# Altium PCB PCB1.2.PcbDoc (part 2 of 2)
Units mm, origin at the board's own origin, x right, y up, seen from the top; angles counter-clockwise.
Board outline 43 x 43 mm, 4 copper layers (Top Layer, Mid-Layer 1, Mid-Layer 2, Bottom Layer); 150 components, 103 nets, 523 pads, 244 vias.
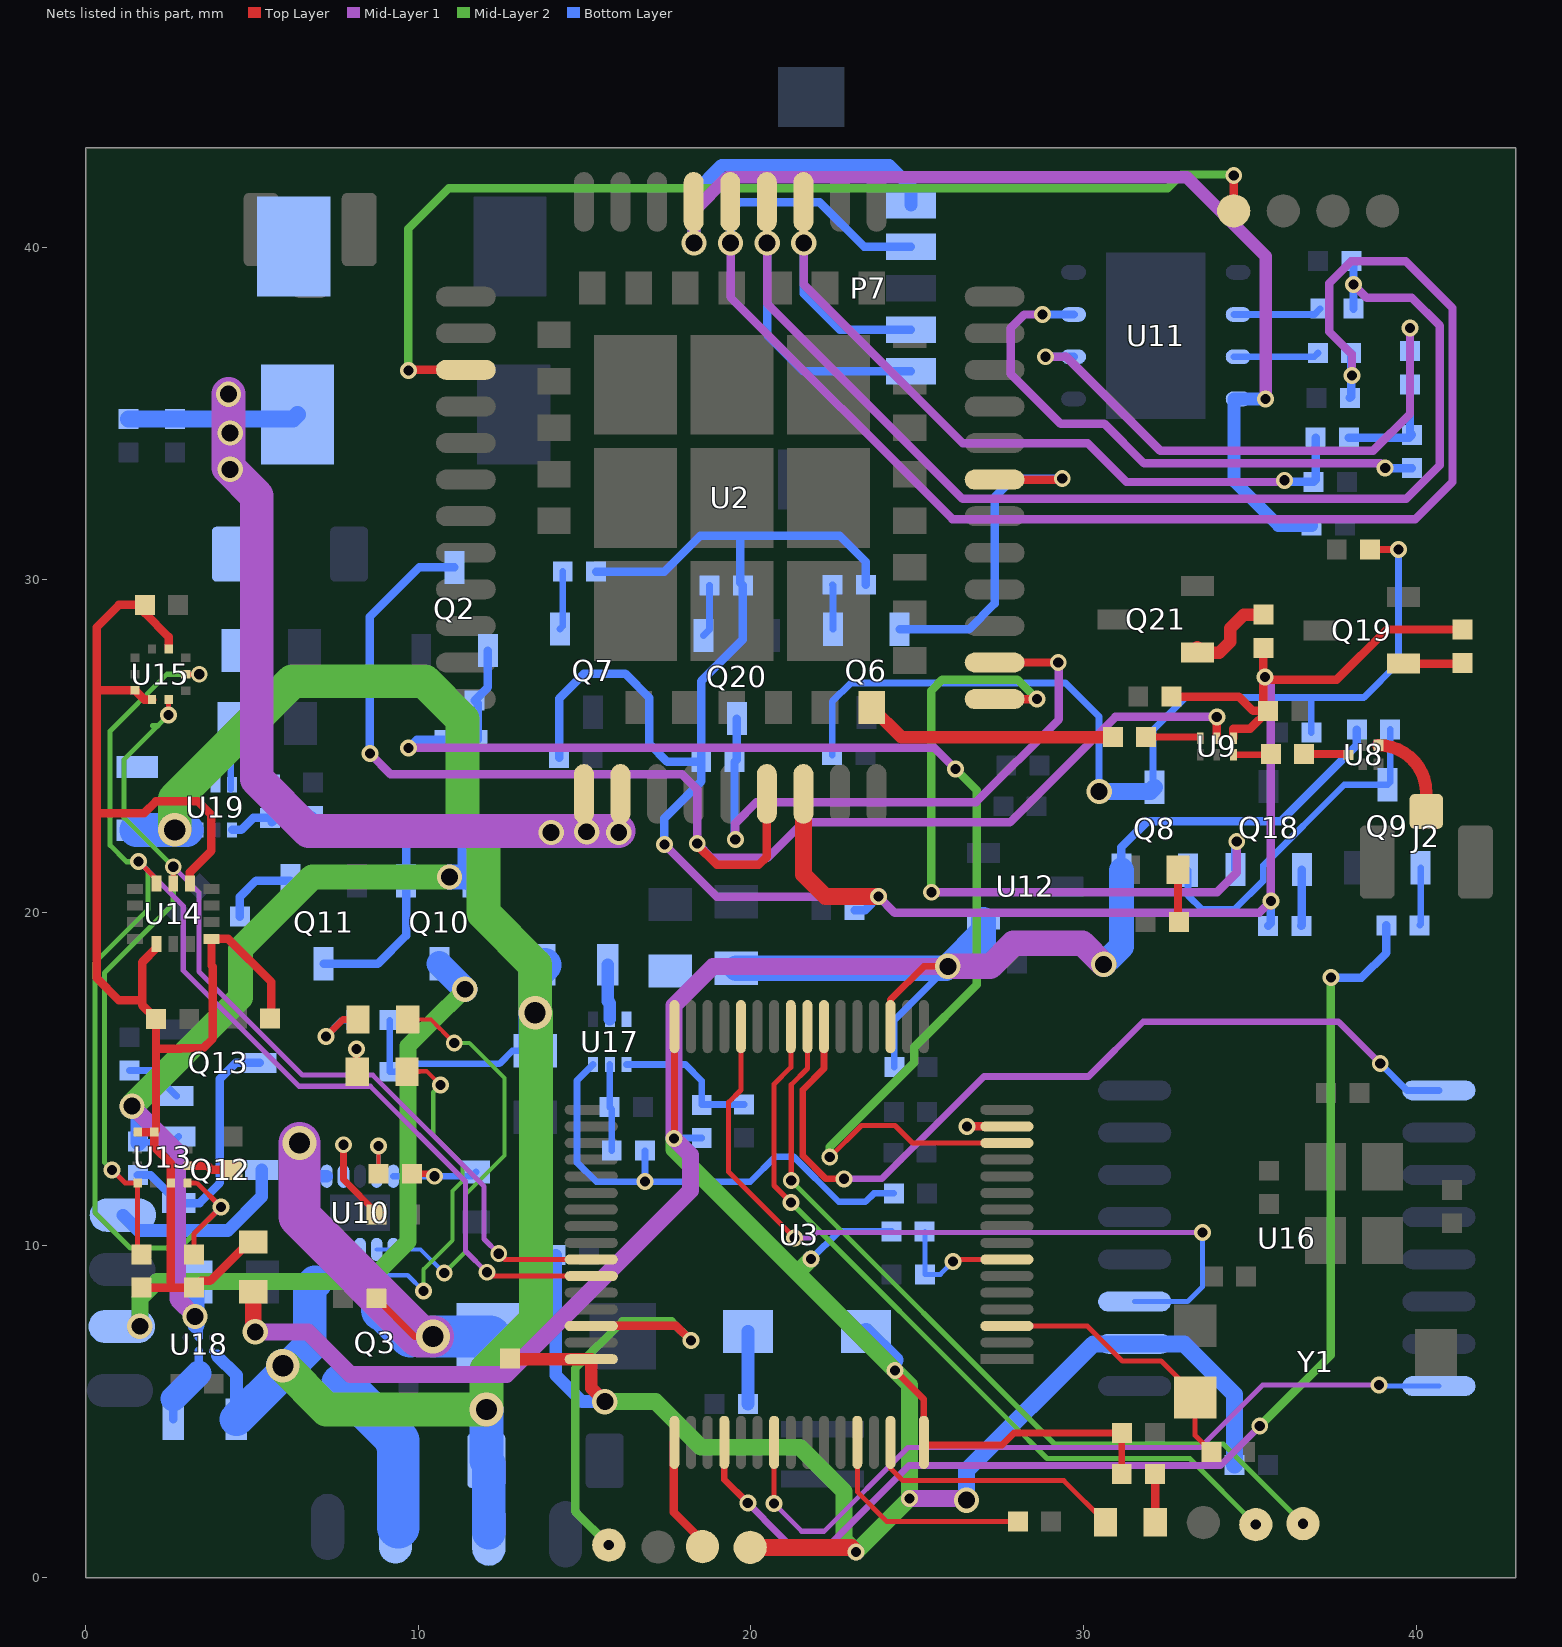
[diagram p4: the nets of this part, all layers, seen from the top]

## Via types
v1: diameter 0.508, hole 0.305, Top Layer to Bottom Layer, tented both sides, 216 vias
v2: diameter 0.762, hole 0.508, Top Layer to Bottom Layer, tented both sides, 21 vias
v3: diameter 1.016, hole 0.635, Top Layer to Bottom Layer, tented both sides, 7 vias

## Nets (pads, with @x,y where several pads share a name; then routed paths per layer and width w, separated by ;. In a path a pad name is that pad's centre, name@x,y a point inside that pad or via, vN(x,y) a via of type N, cw(c..) or ccw(c..) an arc to the next point about the centre after c; other vN are vias at no path point) (continued)
NetC7_1: C7.1 U3.3 Y1.1 | length 8.4
  Top Layer w0.152: U3.3@27.701,7.567 30.119,7.567 31.17,6.516 32.336,6.516 33.36,5.492 Y1.1@33.36,5.413 33.36,4.276 C7.1@33.853,3.783
NetC8_2: C8.2 R6.2 U3.7 | length 3.9
  Top Layer w0.152: v1(26.08,9.506) 26.141,9.567 U3.7@27.701,9.567
  Bottom Layer w0.152: R6.2@25.235,10.406 C8.2@25.235,9.12 25.694,9.12 v1(26.08,9.506)
NetC20_2: C20.2 U9.6 | length 1.6
  Top Layer w0.203: C20.2@31.886,25.273 33.481,25.273 U9.6@33.511,25.244
NetC27_1: C27.1 D2.2 Q3.3 U10.1 | length 13.9
  Top Layer w0.203: C27.1@8.741,8.401 9.891,7.251
  Mid-Layer 1 w1.27: v3(6.425,13.072) 6.425,10.855 10.029,7.251 v3(10.444,7.251)
  Bottom Layer w0.381: 6.425,12.336 6.691,12.069 U10.1@7.25,12.069
  Bottom Layer w1.016: 6.425,12.336 v3(6.425,13.072)
  Bottom Layer w1.27: Q3.3@8.912,8.049 8.968,8.049 9.766,7.251 ; v3(10.444,7.251) D2.2@12.153,7.251
NetC40_1: C40.1 U13.5 | length 1.4
  Top Layer w0.254: U13.5@3.075,12.383 3.664,12.383 3.788,12.259 C40.1@4.411,12.259
NetD1_2: D1.2 R7.1 | length 2.2
  Bottom Layer w0.381: R7.1@19.912,5.22 D1.2@19.912,7.404
NetJ2_1: J2.1 U8.4 | length 2.8
  Top Layer w0.381: U8.4@38.873,25.027 cw(c38.873,23.59) 40.31,23.59 J2.1@40.31,23.039
NetL1_1: L1.1 U9.3 | length 1.1
  Top Layer w0.203: U9.3@34.511,24.744 35.615,24.744 L1.1@35.636,24.765
NetL1_2: L1.2 U8.1 | length 1.3
  Top Layer w0.254: L1.2@36.636,24.765 37.948,24.765 U8.1@37.973,24.74
NetL4_1: L4.1 U17.5 | length 1.7
  Bottom Layer w0.381: L4.1@15.7,18.422 15.7,17.336 15.761,17.275 U17.5@15.761,16.787
NetL5_2: L5.2 U18.B1 | length 2.4
  Bottom Layer w0.254: L5.2@2.632,4.762 L5.2@2.632,5.376 ; 3.402,6.146 U18.B1@3.402,6.82
  Bottom Layer w0.762: L5.2@2.632,5.376 3.402,6.146
NetL6_1: L6.1 U19.5
NetLED1_2: LED1.2 R9.1 | length 1.6
  Top Layer w0.254: LED1.2@32.844,21.285 32.844,19.734 R9.1@32.868,19.71
NetLED2_1: LED2.1 R29.2 | length 2.3
  Top Layer w0.203: v1(7.222,16.27) 7.733,16.781 LED2.1@8.187,16.781
  Bottom Layer w0.203: v1(7.222,16.27) 7.712,16.761 R29.2@8.139,16.761
NetLED2_2: LED2.2 U10.6 U10.7 | length 13
  Top Layer w0.127: LED2.2@9.687,16.781 10.379,16.781 ; 10.657,16.503 10.379,16.781 ; v1(11.082,16.078) 10.379,16.781
  Mid-Layer 2 w0.127: v1(10.78,9.157) 11.42,9.797 11.42,11.523 12.588,12.691 12.588,13.564 12.588,13.741 12.588,15.025 11.535,16.078 v1(11.082,16.078)
  Bottom Layer w0.127: U10.7@8.75,9.869 U10.6@9.25,9.869 10.068,9.869 v1(10.78,9.157)
NetLED4_1: LED4.1 R12.2 | length 1.4
  Top Layer w0.203: v1(8.139,15.894) 8.139,15.236 LED4.1@8.164,15.211
  Bottom Layer w0.203: R12.2@8.139,15.211 v1(8.139,15.894)
NetLED4_2: LED4.2 U10.8 | length 11.3
  Top Layer w0.127: 10.043,15.211 LED4.2@9.664,15.211 9.682,15.229 10.248,15.229 v1(10.667,14.81)
  Mid-Layer 2 w0.127: v1(10.156,8.618) 10.156,9.27 11.029,10.142 11.029,11.628 11.328,11.928 11.328,12.418 10.449,13.297 10.449,14.593 v1(10.667,14.81)
  Bottom Layer w0.127: U10.8@8.25,9.869 8.25,9.483 8.641,9.091 9.682,9.091 v1(10.156,8.618)
NetLED5_1: LED5.1 R65.1 | length 1.5
  Top Layer w0.254: R65.1@32.152,3.122 32.161,3.114 LED5.1@32.161,1.664
NetLED5_2: LED5.2 U3.62 | length 7.9
  Top Layer w0.152: U3.62@24.201,4.067 24.201,3.287 24.573,2.915 29.035,2.915 29.41,2.915 LED5.2@30.661,1.664
NetQ2_1: Q2.1 R10.1 R11.1 | length 2.9
  Bottom Layer w0.254: R10.1@11.782,25.191 11.782,26.289 R11.1@11.697,26.374 12.09,26.767 Q2.1@12.09,27.876
NetQ6_1: Q6.1 R28.1 | length 1.3
  Bottom Layer w0.203: R28.1@22.457,29.855 22.474,29.838 Q6.1@22.474,28.514
NetQ7_1: Q7.1 R31.1 | length 1.8
  Bottom Layer w0.203: Q7.1@14.259,28.521 14.344,28.605 R31.1@14.344,30.25
NetQ8_1: Q8.1 Q9.3 R33.2 | length 10.3
  Bottom Layer w0.203: Q8.1@33.143,21.266 33.143,20.517 33.563,20.097 34.543,20.097 35.41,20.964 35.41,21.409 37.843,23.842 Q9.3@39.141,23.842 ; Q9.3@39.223,23.923 R33.2@39.223,25.499
NetQ9_1: Q9.1 R34.1 | length 1.7
  Bottom Layer w0.203: R34.1@40.109,19.614 40.141,19.646 Q9.1@40.141,21.342
NetQ10_1: Q10.1 Q11.3 R36.2 | length 6.7
  Bottom Layer w0.254: Q11.3@7.156,18.457 8.785,18.457 9.633,19.305 Q10.1@9.633,20.957 9.633,21.982 10.172,22.521 R36.2@10.564,22.521
NetQ11_1: Q11.1 R37.1 | length 2.4
  Bottom Layer w0.254: R37.1@4.637,19.873 4.637,20.472 5.121,20.957 Q11.1@6.08,20.957 ; Q11.1@6.08,20.957 Q11.1@6.156,20.957 6.118,20.918 Q11.1@6.08,20.957
NetQ12_1: Q12.1 Q13.3 R50.2 | length 7.6
  Bottom Layer w0.254: R50.2@1.568,12.107 1.95,12.107 Q12.1@2.794,11.263 3.426,11.263 4.033,11.869 4.033,15.002 4.511,15.479 Q13.3@5.236,15.479
NetQ13_1: Q13.1 R51.1 | length 1.7
  Bottom Layer w0.203: R51.1@1.317,15.249 1.966,15.249 Q13.1@2.736,14.479
NetQ18_1: Q18.1 R40.1 | length 1.7
  Bottom Layer w0.254: R40.1@36.553,19.597 36.569,19.613 Q18.1@36.569,21.29
NetQ19_1: Q19.1 R41.1 | length 1.8
  Top Layer w0.254: Q19.1@39.624,27.483 41.377,27.483 R41.1@41.402,27.508
NetQ20_1: Q20.1 R44.1 | length 1.6
  Bottom Layer w0.203: Q20.1@18.578,28.331 18.757,28.51 R44.1@18.757,29.836
NetQ21_1: Q21.1 R45.1 | length 2.8
  Top Layer w0.381: Q21.1@33.426,27.965 Q21.1@33.426,27.813 34.087,27.813 34.417,28.143 34.417,28.448 34.417,28.55 34.823,28.956 R45.1@35.408,28.956
NetR3_1: R3.1 U3.60 | length 6.7
  Top Layer w0.152: U3.60@23.201,4.067 23.201,2.579 24.088,1.691 R3.1@28.027,1.691
NetR13_1: R13.1 U10.2 | length 3.5
  Top Layer w0.203: v1(7.75,13.017) 7.75,11.969 8.748,10.971 R13.1@8.748,10.912
  Bottom Layer w0.203: U10.2@7.75,12.069 v1(7.75,13.017)
NetR14_1: R14.1 R15.2 U10.5 | length 3.3
  Top Layer w0.203: R14.1@9.805,12.144 10.417,12.144 v1(10.491,12.069)
  Bottom Layer w0.203: U10.5@9.25,12.069 v1(10.491,12.069) 11.613,12.069 R15.2@11.737,12.194
NetR14_2: R14.2 U10.4 | length 1.8
  Top Layer w0.127: R14.2@8.805,12.144 v1(8.805,12.982)
  Bottom Layer w0.127: U10.4@8.75,12.069 8.805,12.125 v1(8.805,12.982)
NetR19_2: R19.2 R20.2 U19.1 | length 2.7
  Bottom Layer w0.254: U19.1@4.401,22.482 4.677,22.482 5.038,22.843 R19.2@5.54,22.843 5.603,22.906 R20.2@6.829,22.906 ; R19.2@5.594,22.707 R19.2@5.664,22.777
NetR21_2: R21.2 R48.2 U17.1 | length 4.5
  Bottom Layer w0.203: U17.1@16.261,15.427 18.036,15.427 18.524,14.939 R21.2@18.524,14.215 18.535,14.226 R48.2@19.799,14.226
NetR23_2: R23.2 U11.7 | length 2.6
  Bottom Layer w0.203: U11.7@34.525,36.71 U11.7@34.652,36.71 ; U11.7@34.652,36.71 35.509,36.71 ; 35.509,36.71 36.939,36.71 R23.2@37.052,36.823
NetR25_1: R25.1 U11.3 | length 16.7
  Mid-Layer 1 w0.254: v1(28.774,37.98) 28.219,37.98 27.813,37.574 27.813,36.195 29.312,34.696 30.632,34.696 31.826,33.503 38.934,33.503 v1(39.073,33.363) ; v1@39.05,33.34 v1@39.065,33.325
  Bottom Layer w0.254: v1(28.774,37.98) U11.3@29.702,37.98 ; v1(39.073,33.363) R25.1@39.88,33.363
NetR25_2: R25.2 R26.2 R27.2 | length 3.5
  Bottom Layer w0.254: R27.2@37.979,34.279 39.796,34.279 R25.2@39.88,34.363 39.819,34.423 R26.2@39.819,35.878
NetR26_1: R26.1 U11.2 | length 16.7
  Mid-Layer 1 w0.254: v1(28.861,36.71) 29.482,36.71 32.309,33.884 38.71,33.884 39.819,34.993 v1(39.819,37.571)
  Bottom Layer w0.254: v1(28.861,36.71) U11.2@29.702,36.71 ; R26.1@39.819,36.878 v1(39.819,37.571)
NetR35_2: R35.2 R49.2 U17.2 | length 2.6
  Bottom Layer w0.203: U17.2@15.761,15.427 15.754,15.42 R35.2@15.754,14.148 15.817,14.085 R49.2@15.817,12.839
NetR39_2: R39.2 U11.6 | length 2.7
  Bottom Layer w0.203: U11.6@34.525,37.98 U11.6@34.652,37.98 ; U11.6@34.652,37.98 35.839,37.98 ; 35.839,37.98 36.945,37.98 R39.2@37.121,38.156
POWER_CTRL_GPS: R34.2 U3.52 | length 37.1
  Top Layer w0.203: U3.52@19.201,4.067 19.201,2.947 v1(19.908,2.239)
  Mid-Layer 1 w0.203: v1(19.908,2.239) 20.875,1.272 ; 20.557,1.59 20.875,1.272 ; v1(35.303,4.554) 34.124,3.375 24.758,3.375 22.44,1.058 21.09,1.058 20.875,1.272
  Mid-Layer 2 w0.254: v1(35.303,4.554) 37.44,6.691 v1(37.44,18.04)
  Bottom Layer w0.254: v1(37.44,18.04) 38.362,18.04 39.109,18.787 R34.2@39.109,19.614
PWRKEY: Q2.3 U2.39 U9.5 | length 41.8
  Top Layer w0.254: v1(18.39,22.073) 18.39,22.022 18.974,21.438 20.244,21.438 20.48,21.674 U2.39@20.48,23.566 ; U9.5@34.011,25.244 v1(34.011,25.883)
  Mid-Layer 1 w0.254: v1(8.544,24.776) 9.165,24.155 17.932,24.155 18.39,23.698 v1(18.39,22.073) 18.821,21.641 20.498,21.641 21.565,22.708 27.788,22.708 30.963,25.883 v1(34.011,25.883)
  Bottom Layer w0.254: v1(8.544,24.776) 8.544,28.897 10.023,30.376 Q2.3@11.09,30.376
RF_IN: C20.1 U2.68 | length 7.6
  Top Layer w0.381: U2.68@23.63,26.166 24.523,25.273 C20.1@30.886,25.273
RI: Q6.2 U2.7 | length 10.7
  Top Layer w0.254: U2.7@27.33,33.016 29.333,33.016 v1(29.362,33.045)
  Bottom Layer w0.254: Q6.2@24.474,28.514 26.558,28.514 27.33,29.286 27.33,32.487 27.889,33.045 v1(29.362,33.045)
RXD3: T18.1 U3.25 | length 23.7
  Top Layer w0.152: U3.25@21.201,16.567 21.201,15.343 20.694,14.837 20.694,11.792 v1(21.207,11.279)
  Mid-Layer 2 w0.152: v1(21.207,11.279) 27.782,4.704 28.906,3.58 33.196,3.58 v1(35.183,1.593)
SCL: R22.2 U3.42 U13.1 U14.13 U15.2 | length 39.9
  Top Layer w0.152: v1(0.795,12.255) 1.179,11.871 U13.1@1.562,11.871 1.562,9.834 R22.2@1.676,9.72 ; v1(2.495,25.941) U15.2@2.495,26.401 ; U14.13@2.633,20.869 v1(2.633,21.374) ; v1(12.42,9.741) 12.594,9.567 U3.42@15.201,9.567
  Mid-Layer 1 w0.152: v1(2.633,21.374) 3.401,20.605 3.401,18.223 6.516,15.107 8.634,15.107 11.975,11.766 11.975,10.185 v1(12.42,9.741)
  Mid-Layer 2 w0.152: v1(0.795,12.255) 0.56,12.49 0.56,18.183 0.924,18.547 ; 0.842,18.465 0.924,18.547 ; 2.017,25.614 2.168,25.614 ; v1(2.495,25.941) 2.168,25.614 ; 0.924,18.547 2.633,20.255 v1(2.633,21.374) 1.158,22.848 1.158,24.604 2.168,25.614
SCLK: U3.55 U16.16 | length 24
  Top Layer w0.152: v1(20.701,2.224) U3.55@20.701,4.067
  Mid-Layer 1 w0.152: v1(20.701,2.224) 21.53,1.394 22.203,1.394 24.722,3.914 33.515,3.914 35.39,5.789 v1(38.887,5.789)
  Bottom Layer w0.152: v1(38.887,5.789) 38.916,5.76 U16.16@40.691,5.76
SDA: R24.1 U3.43 U13.4 U14.14 U15.4 | length 49.5
  Top Layer w0.152: v1(1.59,21.536) 2.133,20.994 U14.14@2.133,20.869 ; U15.4@3.007,27.164 v1(3.413,27.164) ; U13.4@3.062,11.871 3.342,11.871 v1(4.066,11.147) 3.251,10.332 R24.1@3.251,9.72 ; v1(12.061,9.182) 12.176,9.067 U3.43@15.201,9.067
  Mid-Layer 1 w0.152: v1(1.59,21.536) 2.933,20.194 2.933,18.258 6.416,14.774 8.557,14.774 11.421,11.911 11.421,9.822 v1(12.061,9.182)
  Mid-Layer 2 w0.152: v1@1.59,21.524 1.229,21.524 0.734,22.019 0.734,25.458 2.44,27.164 v1(3.413,27.164) ; v1(1.59,21.536) 1.877,21.249 1.877,20.095 0.273,18.492 0.273,10.976 1.341,9.909 2.827,9.909 v1(4.066,11.147)
SIM_CLK: C17.2 P7.1 R39.1 U2.16 | length 41.2
  Mid-Layer 1 w0.254: v2(20.49,40.132) 20.49,38.311 26.365,32.436 39.7,32.436 40.716,33.452 40.716,37.643 39.878,38.481 38.519,38.481 v1(38.121,38.879)
  Bottom Layer w0.254: v2(20.49,40.132) 20.49,37.371 21.59,36.271 P7.1@24.816,36.271 ; C17.2@38.057,39.584 38.121,39.52 v1(38.121,38.879) R39.1@38.121,38.156
SIM_DATA: C18.2 P7.2 R27.1 U2.15 | length 26.9
  Top Layer w0.254: U2.15@21.58,41.366 21.58,40.142 v2(21.59,40.132)
  Mid-Layer 1 w0.254: v2(21.59,40.132) 21.59,38.887 26.365,34.112 30.124,34.112 31.293,32.944 35.992,32.944 v1(36.043,32.995)
  Bottom Layer w0.254: v2(21.59,40.132) 21.59,38.608 22.677,37.521 P7.2@24.816,37.521 ; v1(36.043,32.995) 36.089,32.948 C18.2@36.922,32.948 36.979,33.005 R27.1@36.979,34.279
SIM_PWR: R10.2 U3.14 | length 37.6
  Top Layer w0.152: v1(22.373,12.642) 23.325,13.594 24.334,13.594 24.861,13.067 U3.14@27.64,13.067 ; U3.14@27.64,13.006 U3.14@27.701,13.067
  Mid-Layer 1 w0.254: v1(9.711,24.949) 25.519,24.949 v1(26.151,24.317)
  Mid-Layer 2 w0.254: v1(22.373,12.642) 22.373,12.948 24.915,15.489 24.915,15.948 26.797,17.831 26.797,23.671 v1(26.151,24.317)
  Bottom Layer w0.254: v1(9.711,24.949) 9.953,25.191 R10.2@10.782,25.191
SIM_RST: C16.2 P7.4 R23.1 U2.17 | length 47.8
  Mid-Layer 1 w0.254: v2(19.39,40.132) 19.39,38.497 26.06,31.826 39.98,31.826 41.097,32.944 41.097,38.176 39.689,39.584 38.057,39.584 37.389,38.916 37.389,37.465 38.075,36.779 v1(38.075,36.144)
  Bottom Layer w0.254: v2(19.39,40.132) 19.39,41.107 19.634,41.351 22.073,41.351 23.403,40.021 P7.4@24.816,40.021 ; C16.2@38.014,35.472 38.052,35.51 R23.1@38.052,36.823
SIM_RST1: U3.15 | length 1.2
  Top Layer w0.254: v1(26.502,13.567) U3.15@27.701,13.567
SIM_RXD: Q20.3 R46.1 U2.2 | length 19.4
  Top Layer w0.254: U2.2@27.33,27.516 v1(29.243,27.516) v1@29.261,27.534
  Mid-Layer 1 w0.254: v1(19.533,22.2) 19.533,22.682 20.168,23.317 26.772,23.317 29.261,25.806 ; 29.261,26.365 29.261,25.806 ; v1@29.261,27.534 29.261,25.806
  Bottom Layer w0.254: v1(19.533,22.2) 19.508,22.224 R46.1@19.508,24.528 19.578,24.598 Q20.3@19.578,25.831
SIM_TXD: Q18.2 U2.1 | length 22.1
  Top Layer w0.254: U2.1@27.33,26.416 v1(28.6,26.416)
  Mid-Layer 1 w0.254: v1(25.427,20.609) 34.021,20.609 34.611,21.2 v1(34.611,22.14)
  Mid-Layer 2 w0.254: v1(25.427,20.609) 25.427,26.672 25.756,27 28.016,27 v1(28.6,26.416)
  Bottom Layer w0.254: Q18.2@34.569,21.29 v1@34.569,22.098
SIM_VDD: C14.2 P7.5 U2.18 U11.8 | length 39.3
  Mid-Layer 1 w0.381: v2(18.29,40.132) 18.29,41.099 19.301,42.11 33.099,42.11 35.484,39.726 v1@35.484,35.44
  Bottom Layer w0.381: v2(18.29,40.132) 18.29,41.633 19.126,42.469 24.155,42.469 24.816,41.808 P7.5@24.816,41.271 ; v1(35.476,35.44) 34.525,35.44 34.525,32.971 35.86,31.636 C14.2@36.861,31.636
SPI_RESET: U3.28 U16.3 | length 23.5
  Top Layer w0.152: U3.28@19.701,16.567 19.701,14.662 19.334,14.295 19.334,12.195 v1(21.311,10.217)
  Mid-Layer 1 w0.152: v1(21.311,10.217) 21.816,10.217 21.973,10.375 v1(33.579,10.375)
  Bottom Layer w0.152: U16.3@31.541,8.3 33.135,8.3 33.579,8.744 v1(33.579,10.375)
SWCLK: T10.1 U3.49 | length 3.5
  Top Layer w0.254: U3.49@17.701,4.067 17.688,4.054 17.688,1.961 18.544,1.105 T10.1@18.544,0.932
SWD: T9.1 U3.46 | length 13.2
  Top Layer w0.254: U3.46@15.201,7.567 17.757,7.567 v1(18.195,7.129)
  Mid-Layer 2 w0.254: v1(15.729,0.977) 14.715,1.99 14.715,5.569 14.715,6.287 16.135,7.707 17.108,7.707 17.617,7.707 v1(18.195,7.129)
TXD3: T11.1 U3.24 | length 24.5
  Top Layer w0.152: v1(21.214,11.937) 21.214,14.823 21.701,15.31 U3.24@21.701,16.567
  Mid-Layer 2 w0.152: v1(21.214,11.937) 29.13,4.021 34.14,4.021 34.203,4.021 v1(36.602,1.622)
VBAT: C44.1 D4.2 L4.2 L5.1 L6.2 R2.1 R12.1 R29.1 R49.1 T17.1 U10.10 U17.3 U18.A1 U19.3 | length 78.2
  Mid-Layer 2 w1.016: v3(2.678,22.485) 2.678,23.41 6.22,26.953 10.184,26.953 11.328,25.808 11.328,22.752 11.957,22.123 11.957,19.98 13.515,18.422 v3(13.515,16.986) ; v3(5.927,6.373) 7.245,5.055 v3(12.047,5.055) 12.047,6.253 13.54,7.746 v3@13.54,16.96
  Bottom Layer w0.203: R29.1@9.139,16.761 R12.1@9.139,15.211 9.63,15.211 9.869,15.45 12.438,15.45 12.829,15.841 C44.1@13.52,15.841 ; U17.3@15.253,15.427 14.774,14.948 14.774,12.485 15.355,11.904 18.77,11.904 19.983,11.904 20.736,12.657 21.286,12.657 22.643,11.301 23.441,11.301 23.696,11.556 R2.1@24.299,11.556 ; v1(16.817,11.911) R49.1@16.817,12.839
  Bottom Layer w0.381: 3.953,6.669 4.532,6.09 L5.1@4.532,4.762 ; 7.25,9.216 U10.10@7.25,9.869
  Bottom Layer w0.508: L6.2@1.523,22.482 L6.2@1.544,22.482 ; 6.739,8.705 7.25,9.216
  Bottom Layer w1.016: L6.2@1.523,22.482 1.544,22.482 v3@3.027,22.482 ; L5.1@4.532,4.762 v3@5.927,6.156 ; v3(5.927,6.373) v3@5.927,6.156 ; 6.895,8.876 6.739,8.721 6.739,8.705 6.739,6.969 v3@5.927,6.156 ; v3(12.047,5.055) D4.2@12.047,3.513 12.12,3.441 T17.1@12.12,1.355 ; C44.1@13.52,15.841 13.515,15.847 v3(13.515,16.986) 13.515,18.137 L4.2@13.8,18.422
VBAT_OUT: C24.2 C29.1 C31.1 C43.2 C47.1 C48.1 D3.2 R19.1 U2.34 U2.35 U19.6 | length 30.6
  Mid-Layer 1 w1.016: v2(4.293,35.585) 4.293,33.376 5.143,32.525 5.143,24.016 6.706,22.454 v2@16.027,22.454
  Bottom Layer w0.203: U19.6@4.361,23.707 4.361,25.579 C47.1@4.462,25.679
  Bottom Layer w0.508: C43.2@1.283,34.833 C24.2@2.68,34.833 6.231,34.833 C29.1@6.371,34.972
  other v2: 13.995,22.403 16.027,22.403 15.062,22.428 4.343,33.325 4.343,34.417
VBUS: T1.1 U2.24 | length 32.6
  Top Layer w0.254: v1(9.703,36.297) 9.722,36.316 U2.24@11.43,36.316 ; T1.1@34.519,41.097 v1(34.519,42.164)
  Mid-Layer 2 w0.254: v1(9.703,36.297) 9.703,40.564 10.922,41.783 32.537,41.783 32.944,42.189 34.493,42.189 v1(34.519,42.164)
VCC_3.3V_S: Q8.3 R30.2 R42.2 R43.2 | length 29.5
  Top Layer w0.203: R43.2@38.617,30.912 v1(39.472,30.912)
  Bottom Layer w0.203: R30.2@22.446,24.732 22.446,26.338 23.006,26.899 25.476,26.899 29.464,26.899 30.472,25.891 v2(30.472,23.636) ; Q8.3@32.143,23.766 32.096,23.813 32.096,25.492 33.071,26.467 36.805,26.467 ; R42.2@36.851,25.411 36.851,26.421 36.805,26.467 ; v1(39.472,30.912) 39.472,27.508 38.43,26.467 36.805,26.467
  Bottom Layer w0.508: v2(30.472,23.636) 32.012,23.636 Q8.3@32.143,23.766
VCC_3V: C11.2 C12.2 C13.2 C15.2 C28.1 C34.1 C37.1 C50.2 D1.1 FB2.1 Q8.2 R6.1 R21.1 R33.1 R65.2 T19.1 U3.19 U3.32 U3.48 U3.64 U12.1 U16.2 U17.6 | length 137.2
  Top Layer w0.203: v1@17.701,13.222 U3.32@17.701,16.567 ; U3.19@24.201,16.567 24.201,17.377 25.204,18.381 v2(25.925,18.381) ; v1(24.332,6.225) 25.201,5.356 U3.64@25.201,4.067 ; U3.64@25.24,4.028 25.201,3.988 27.548,3.988 27.908,4.348 C12.2@31.154,4.348 R65.2@31.152,3.122 R65.2@31.152,3.122
  Top Layer w0.381: C13.2@12.76,6.567 U3.48@15.201,6.567 15.201,5.702 v2(15.609,5.294)
  Top Layer w0.508: v2@5.037,7.391 FB2.1@5.037,8.594 ; T19.1@19.98,0.911 v1@23.023,0.911
  Mid-Layer 1 w0.508: v2(5.097,7.391) 6.678,7.391 7.961,6.109 12.649,6.109 18.179,11.639 18.179,12.713 v1(17.685,13.207) 17.685,17.206 18.859,18.381 v2(25.925,18.381) ; v1(24.769,2.375) v2@26.485,2.375
  Mid-Layer 1 w0.762: v2(25.925,18.381) 27.2,18.381 27.894,19.075 29.972,19.075 v2(30.607,18.44)
  Mid-Layer 2 w0.508: v2(15.609,5.294) 17.129,5.294 18.501,3.921 21.474,3.921 22.796,2.599 22.796,1.138 v1(23.164,0.77) v1(24.769,2.375) 24.769,5.788 v1(24.332,6.225) 17.986,12.571 17.685,12.872 v1(17.685,13.207) ; 21.587,9.356 v1(21.813,9.582)
  Bottom Layer w0.203: v1@17.694,13.215 R21.1@18.524,13.215 ; v1(21.813,9.582) 22.645,10.413 R6.1@24.228,10.413 ; C15.2@24.314,15.348 24.314,16.77 v2@25.866,18.321
  Bottom Layer w0.254: Q8.2@31.143,21.266 31.143,21.965 31.918,22.74 35.923,22.74 38.223,25.039 R33.1@38.223,25.499
  Bottom Layer w0.381: C50.2@14.129,9.697 14.129,6.087 14.923,5.294 v2(15.609,5.294)
  Bottom Layer w0.508: D1.1@23.468,7.089 D1.1@23.468,7.404 24.332,6.54 ; v2(26.485,2.329) 26.485,3.219 30.296,7.03 U16.2@31.541,7.03 33.019,7.03 34.544,5.505 C11.2@34.544,3.386
  Bottom Layer w0.762: C28.1@19.561,18.321 v2@25.866,18.321 ; v2(25.925,18.381) 26.996,19.452 ; C37.1@26.996,18.462 26.996,19.452 ; U12.1@26.996,19.783 26.996,19.452 ; v2@30.769,18.602 31.143,18.976 Q8.2@31.143,21.266
VCC_3V_SENSOR: C35.2 C38.2 C41.2 FB2.2 R22.1 R24.2 U13.3 U13.9 U13.10 U14.5 U14.8 U14.12 U15.1 U15.6 U15.10 | length 47.5
  Top Layer w0.254: U13.10@1.562,13.396 U13.9@2.062,13.396 ; R22.1@1.676,8.72 2.577,8.72 ; U15.1@1.995,26.401 1.762,26.401 U15.10@1.482,26.681 0.354,26.681 0.336,26.699 ; C41.2@2.098,16.812 1.7,17.211 1.7,17.365 ; 2.113,16.463 2.113,15.908 ; U14.5@2.133,19.049 2.133,18.938 1.7,18.505 1.7,17.365 ; U15.6@2.495,27.926 2.495,28.284 1.778,29.001 C35.2@1.778,29.246 1,29.246 0.336,28.582 0.336,26.699 ; U14.12@3.133,20.869 3.133,21.208 3.781,21.857 3.781,22.933 3.375,23.339 2.112,23.339 1.757,22.984 0.371,22.984 0.336,22.949 ; R24.2@3.351,8.72 R24.2@3.251,8.72 ; R24.2@3.351,8.82 R24.2@3.251,8.72 ; FB2.2@5.037,10.094 4.916,10.094 3.745,8.922 3.453,8.922 R24.2@3.251,8.72 ; C38.2@5.544,16.811 5.583,16.851 5.583,17.91 ; 5.583,17.379 5.583,17.91 ; 0.336,22.949 0.336,18.021 0.991,17.365 1.7,17.365 ; 0.336,22.949 0.336,26.699 ; U13.9@2.062,13.396 2.113,13.447 2.113,15.908 ; U13.9@2.062,13.396 2.062,12.955 2.562,12.455 U13.3@2.562,11.871 2.562,8.734 2.577,8.72 ; 2.113,15.908 2.87,15.908 2.873,15.911 3.518,15.911 3.823,16.216 3.823,18.363 3.783,18.403 U14.8@3.783,19.209 4.284,19.209 5.583,17.91 ; 2.577,8.72 R24.2@3.251,8.72
VCC_5V: C46.1 Q10.2 Q12.2 R36.1 R50.1 U18.B2 | length 26.9
  Mid-Layer 1 w0.508: v2(1.391,14.176) 2.769,12.799 2.769,8.371 v2(3.287,7.852)
  Mid-Layer 2 w0.762: v2(1.391,14.176) 4.655,17.44 4.655,18.909 6.813,21.067 v2(10.941,21.067)
  Bottom Layer w0.203: R50.1@1.595,13.107 R50.1@1.568,13.107 ; R50.1@1.724,13.263 1.595,13.134 R50.1@1.568,13.107 ; Q12.2@2.794,13.263 2.612,13.08 1.595,13.08 R50.1@1.568,13.107
  Bottom Layer w0.254: v2@3.317,7.59 3.402,7.506 U18.B2@3.402,7.22
  Bottom Layer w0.508: v2(1.391,14.176) 1.595,13.972 1.595,13.134 1.595,13.107 R50.1@1.595,13.08 ; v2@3.317,7.59 C46.1@3.317,8.891
  Bottom Layer w0.762: v2(10.941,21.067) Q10.2@11.523,21.067 ; Q10.2@11.564,21.026 R36.1@11.564,22.521
VCC_5V1: Q10.3 T4.1 | length 19
  Mid-Layer 2 w0.508: v2(1.627,7.559) 1.627,8.394 2.14,8.906 8.497,8.906 9.691,10.1 9.691,15.981 10.384,16.674 v2(11.4,17.69)
  Bottom Layer w0.762: Q10.3@10.633,18.457 v2(11.4,17.69)
VCC_5V2: Q12.3 T5.1 | length 5.6
  Bottom Layer w0.381: T5.1@1.119,10.897 1.578,10.438 3.261,10.438 3.47,10.438 4.276,10.438 5.294,11.457 Q12.3@5.294,12.263
VCC_IN: Q3.2 T15.1 | length 5.1
  Bottom Layer w1.27: Q3.2@7.707,5.81 9.312,4.204 ; 9.312,4.117 9.312,4.204 ; T15.1@9.399,1.508 9.399,4.117 9.312,4.204
VDD_EXT: C19.2 C33.2 R28.2 R31.2 R32.2 R40.2 R41.2 R44.2 R45.2 R46.2 R47.2 U2.40 U9.4 | length 74.7
  Top Layer w0.254: R47.2@32.648,26.492 34.671,26.492 35.103,26.06 C19.2@35.551,26.06 ; U9.4@34.511,25.244 34.511,25.527 35.017,25.527 C19.2@35.551,26.06 ; 35.408,26.518 v1@35.408,27 ; R45.2@35.408,27.956 v1@35.408,27 ; R41.2@41.443,28.55 R41.2@41.402,28.508 39.125,28.508 37.617,27 v1@35.408,27 ; v1@35.408,27 35.408,26.203 C19.2@35.551,26.06
  Top Layer w0.508: U2.40@21.58,23.566 21.58,21.142 22.248,20.475 v1(23.842,20.475)
  Mid-Layer 1 w0.254: v1(17.399,22.047) 18.971,20.475 v1(23.842,20.475) 24.327,19.99 35.28,19.99 v1(35.639,20.349) ; v1(35.458,27.076) 35.639,26.896 v1(35.639,20.349) ; v1@35.639,20.194 v1(35.639,20.349)
  Bottom Layer w0.254: R32.2@14.238,24.65 14.238,26.434 14.981,27.177 16.225,27.177 16.949,26.453 16.949,25.063 17.484,24.528 R46.2@18.508,24.528 ; R31.2@15.344,30.25 17.4,30.25 18.484,31.334 19.675,31.334 ; v1(17.399,22.047) 17.399,22.835 18.508,23.944 R46.2@18.508,24.528 ; C33.2@23.117,20.072 23.439,20.072 v1(23.842,20.475) ; R28.2@23.457,29.855 23.457,30.543 22.666,31.334 19.675,31.334 ; R40.2@35.553,19.597 35.639,19.683 v1(35.639,20.349) ; R46.2@18.508,24.528 18.508,26.957 19.757,28.206 R44.2@19.757,29.836 19.675,29.919 19.675,31.334
WP: U3.23 U16.9 | length 26.4
  Top Layer w0.203: U3.23@22.201,16.567 22.201,15.306 21.561,14.666 21.561,12.693 22.262,11.992 v1(22.798,11.992)
  Mid-Layer 1 w0.203: v1(22.798,11.992) 23.932,11.992 27.011,15.071 30.154,15.071 31.799,16.715 37.665,16.715 v1(38.925,15.455)
  Bottom Layer w0.203: v1(38.925,15.455) 39.73,14.65 U16.9@40.691,14.65
pads on no net: P7. P7.0 U2.3 U2.4 U2.5 U2.9 U2.10 U2.11 U2.12 U2.14 U2.20 U2.22 U2.23 U2.28 U2.29 U2.38 U2.42 U2.43 U2.44 U2.46 U2.47 U2.48 U2.49 U2.50 U2.51 U2.52 U2.53 U2.54 U2.55 U2.56 U2.57 U2.58 U2.59 U2.60 U2.64 U2.65 U3.2 U3.9 U3.10 U3.11 U3.20 U3.26 U3.27 U3.29 U3.30 U3.33 U3.34 U3.38 U3.39 U3.40 U3.41 U3.51 U3.53 U3.54 U3.56 U3.61 U10.9 U11.4 U11.5 U13.2 U13.7 U13.11 U13.12 U14.4 U14.9 U14.10 U14.11 U15.7 U16.1 U16.4 U16.5 U16.6 U16.11 U16.12 U16.13 U16.14 Y1.3 Y2.2 Y2.4

## Polygon pours and split planes (outlines as drawn)
AGND on Top Layer "Mid-Layer 1-No Net" (solid, remove dead copper, pour order 1000): -3.885,46.331 -3.643,46.573 48.88,46.573 48.88,3.101 45.405,-0.374 43.466,-2.313 6.943,-2.313 -2.996,-2.313 -5.097,-0.212 -3.239,1.646 -3.239,46.654
AGND on Mid-Layer 1 "Mid-Layer 1-No Net" (solid, remove dead copper, pour order 1001): -5.308,45.609 -5.066,45.851 47.457,45.851 47.457,2.379 43.982,-1.096 42.043,-3.035 5.52,-3.035 -4.419,-3.035 -6.52,-0.934 -4.662,0.924 -4.662,45.932
AGND on Mid-Layer 2 "Mid-Layer 1-No Net" (solid, remove dead copper, pour order 1002): -4.858,44.691 -4.616,44.933 47.907,44.933 47.907,1.461 44.432,-2.014 42.493,-3.953 5.97,-3.953 -3.969,-3.953 -6.07,-1.852 -4.212,0.006 -4.212,45.014
AGND on Bottom Layer "Mid-Layer 1-No Net" (solid, remove dead copper, pour order 1003): -5.042,44.879 -4.8,45.12 47.723,45.12 47.723,1.648 44.248,-1.827 42.309,-3.765 5.786,-3.765 -4.153,-3.765 -6.254,-1.665 -4.396,0.193 -4.396,45.201

## Keep-outs
Keep-Out Layer:
  circle w0.127: c41.5,41.5 r1.3
  circle w0.127: c1.5,1.5 r1.3
  circle w0.127: c1.5,41.5 r1.3
  circle w0.127: c41.5,1.5 r1.3
  lines w0.127: 0.1,0.1 42.9,0.1 42.9,42.9 0.1,42.9 0.1,0.1

## Other copper
Top Layer:
  rectangle net VBAT_OUT: 13.437,22.022 16.485,24.46
  region net VBAT_OUT: 3.658,32.893 5.359,32.893 5.359,36.068 3.658,36.068
Bottom Layer:
  rectangle net AGND: 7.341,10.414 10.068,11.481
  region net VBAT_OUT: 3.865,40.354 5.422,41.91 7.393,41.91 7.705,41.599 7.705,33.451 5.57,31.316 5.57,30.718 5.177,30.325 5.177,24.217 5.884,24.141 5.897,23.443 4.904,23.378 4.63,23.572 4.206,23.569 4.225,24.745 3.895,25.206
  region net NetL6_1: 3.792,24.349 3.794,24.346 3.794,23.902 3.829,23.868 4.029,23.868 4.029,24.759 3.593,25.194 2.6,25.194 2.2,24.794 0.907,24.794 0.819,24.706 0.819,24.098 0.908,24.009 2.175,24.009 2.52,24.353 3.754,24.353 3.754,23.942 3.795,23.901
  region net VCC_3V: 16.107,17.025 16.11,17.028 16.463,17.028 16.896,17.461 16.896,18.726 16.963,18.794 20.212,18.794 20.256,18.75 20.256,17.832 20.046,17.622 17.796,17.622 16.707,16.533 16.107,16.533
  region net VBAT: 12.866,16.31 14.257,16.31 14.903,15.664 15.398,15.664 15.416,15.646 15.416,15.204 15.394,15.182 15.389,15.187 15.005,15.187 14.911,15.094 13.012,15.094 12.866,15.24

## Silkscreen, mask and mechanical layers (free items; w line width, h text height)
Top Overlay:
  rectangle: 30.124,37.16 39.065,42.088
  lines w0.127: 1.533,27.313 1.539,27.313 ; 1.794,33.44 2.184,33.831 ; 2.593,33.422 2.184,33.831 ; 4.44,30.757 4.849,31.166 ; 4.459,31.556 4.849,31.166 ; 24.417,0.19 24.423,0.19 ; 24.814,-0.2 24.423,0.19 ; 24.832,0.599 24.423,0.19 ; 27.088,0.19 24.423,0.19 ; 2.184,33.831 2.184,31.166 4.849,31.166
  text "NBIOT Tracer" at 28.677,34.62 h2.54
  text "Y" at 1.547,33.35 h0.51
  text "X" at 4.646,32.461 h0.51 r180
  text "V1.0" at 32.36,32.41 h2.54
  text "Y" at 23.475,0.779 h0.51 r180
Bottom Overlay:
  text "SWCLK" at 19.101,4.572 h1.27 r90
  text "SWD" at 21.666,3.48 h1.27 r90
  text "3.3V" at 17.856,2.972 h1.27 r90
  text "G" at 20.345,1.372 h1.27 r90
Mechanical 1:
  circle w0.127: c1.5,1.5 r1.2
  circle w0.127: c41.5,41.5 r1.2
  circle w0.127: c1.5,41.5 r1.2
  circle w0.127: c41.5,1.5 r1.2
  lines w0.127: 0,-0.019 43,0 43,43 ; 0,0 0,43 43,43 ; 42.795,42.795 43,43

## Text inside footprints (layer, text, board x,y; h text height)
BATT: Bottom Overlay "+" at 22.403,4.984 h1.02